# Altium PCB front_controller.PcbDoc
Units mil, origin at the board's own origin, x right, y up, seen from the top; angles counter-clockwise.
Board outline 2850 x 1885 mil, 2 copper layers (Top Layer, Bottom Layer); 15 components, 18 nets, 84 pads, 0 vias.
Unrouted connection lines stored in the file: 32.
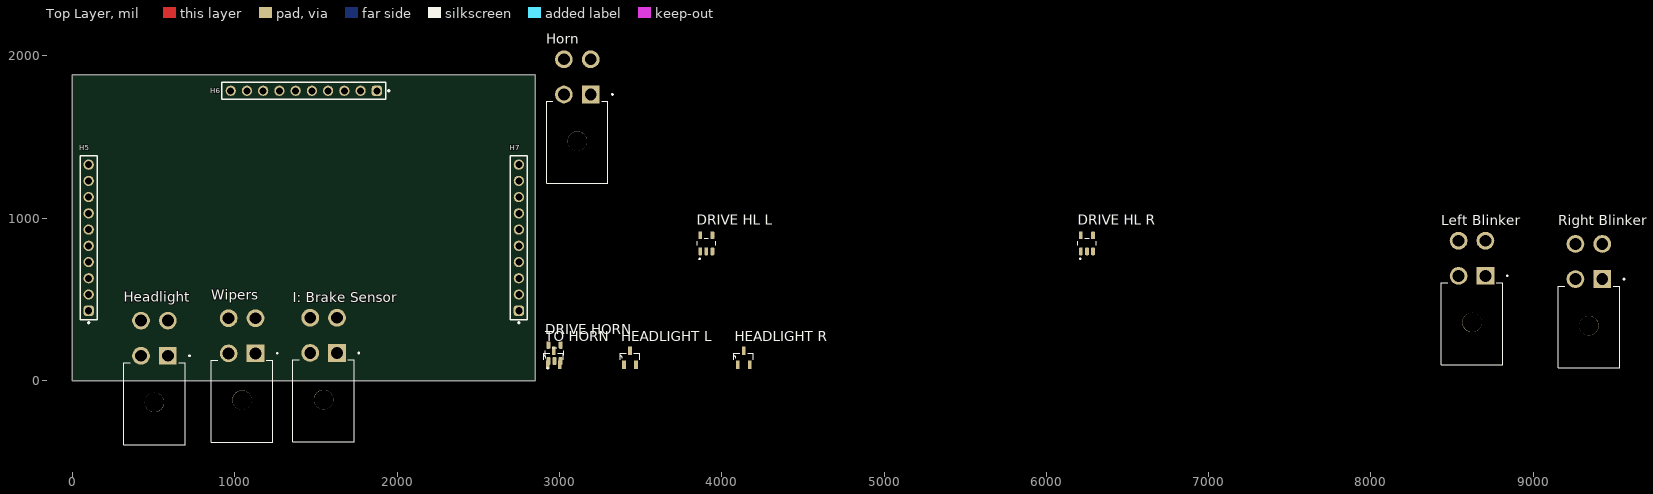
[diagram p0: Top Layer view]
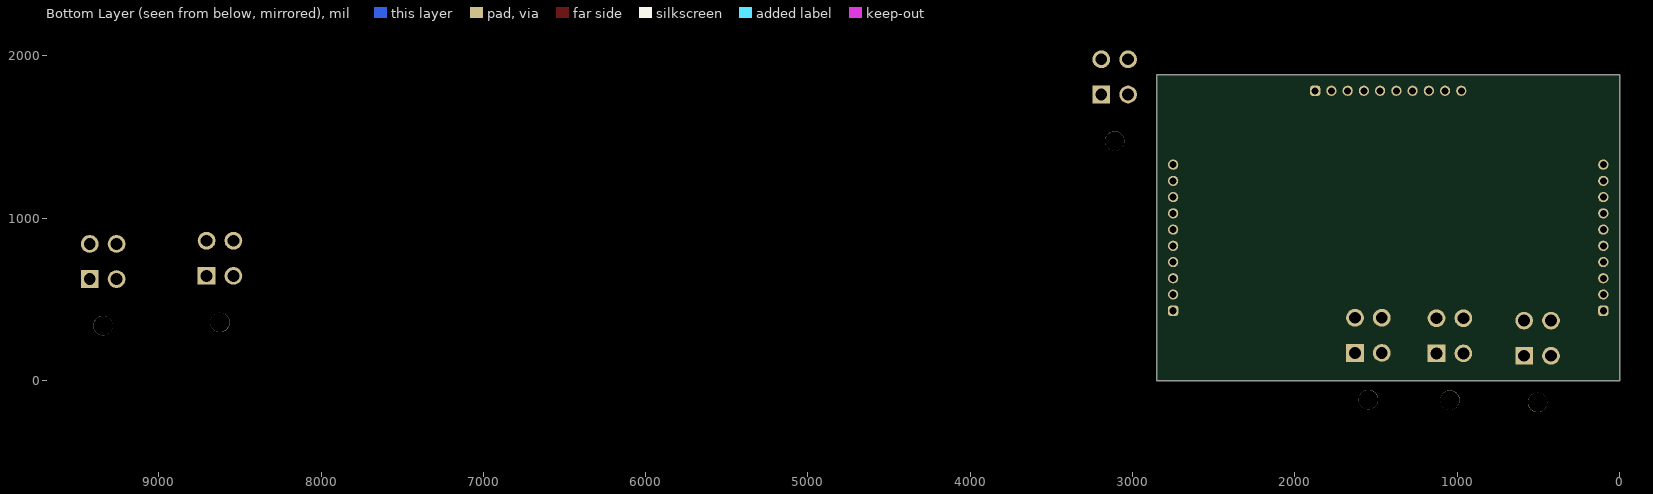
[diagram p1: Bottom Layer view, seen from below]

## Layer stack, top to bottom
Top Solder: solder mask 0.4, Solder Resist, Dk 3.5
Top Layer: signal copper 1.4
Dielectric 1: dielectric 12.6, FR-4, Dk 4.8
Bottom Layer: signal copper 1.4
Bottom Solder: solder mask 0.4, Solder Resist, Dk 3.5

## Board outline
0,0 2850,0 2850,1885 0,1885

## Design rules (kind name [scope] priority, off if disabled: settings)
Clearance [All] p1: gap=10 ignorepadtopadclearanceinfootprint=FALSE
PolygonConnect [All] p1: connectstyle=Relief reliefconductorwidth=10 reliefentries=4 polygonreliefangle="90 Angle" airgapwidth=10
RoutingVias [All] p1: holewidth=28 width=50 viastyle="Through Hole" minholewidth=28 minwidth=50 maxholewidth=28 maxwidth=50
SolderMaskExpansion [All] p1: expansion=4 istentingtop=FALSE
Width [All] p1: maxlimit=10 minlimit=10 preferedwidth=10
30 further rules are at their usual default settings.

## Components (designator, comment, footprint, x,y, rotation, side; value= is the part's Value field where it differs from the comment)
"DRIVE HL L" "UCC27519DBVR" SOT95P280X145-5N 3905,845 r90 top
"DRIVE HL R" "UCC27519DBVR" SOT95P280X145-5N 6250,845 r90 top
"DRIVE HORN" "UCC27519DBVR" SOT95P280X145-5N 2970,170 r90 top
H5 "61301011121" 61301011121 100,880 r90 top
H6 "61301011121" 61301011121 1425,1785 r180 top
H7 "61301011121" 61301011121 2750,880 r90 top
Headlight "0026013115" MOLEX_0026013115 587.68,152.4 r0 top
"HEADLIGHT L" "IRLML6344TRPBF" SOT95P240X112-3N 3435,140 r90 top
"HEADLIGHT R" "IRLML6344TRPBF" SOT95P240X112-3N 4135,140 r90 top
Horn "0026013115" MOLEX_0026013115 3192.68,1762.4 r0 top
"I: Brake Sensor" "0026013115" MOLEX_0026013115 1630,170 r0 top
"Left Blinker" "0026013115" MOLEX_0026013115 8705,645 r0 top
"Right Blinker" "0026013115" MOLEX_0026013115 9425,625 r0 top
"TO HORN" "IRLML6344TRPBF" SOT95P240X112-3N 2965,140 r90 top
Wipers "0026013115" MOLEX_0026013115 1127.68,167.4 r0 top

## Footprints (in the part's own frame and the unit in brackets; to place one, negate y for a bottom-side part, rotate by r counter-clockwise, add the part's x,y. Pads: shape width x height; smd on the part's side, far side on the other; paste and mask are expansions set on the pad)
61301011121 [mm] "Pin Header, pitch 2.54 mm, THT, Vertical, single row, 10p"
  rrect50% 1.6x1.6 hole 1.1: 1(-11.43,0)
  round 1.6 hole 1.1: 2(-8.89,0) 3(-6.35,0) 4(-3.81,0) 5(-1.27,0) 6(1.27,0) 7(3.81,0) 8(6.35,0) 9(8.89,0) 10(11.43,0)
  silkscreen extent -13.42,-1.35 12.85,1.35, body extent -12.7,-1.27 12.7,1.27, height 8.57
MOLEX_0026013115 [mm]
  rect 2.775x2.775 hole 1.85: 1(0,0)
  round 2.775 hole 1.85: 2(-4.2,0) 3(0,5.5) 4(-4.2,5.5)
  round 3.05 hole 3.05 unplated: ""(-2.1,-7.3)
  silkscreen extent -6.9,-13.9 3.5,0.1
SOT95P240X112-3N [mil]
  rect 52x22 smd: 1(-43,37) 2(-43,-37) 3(43,0)
  silkscreen extent -11,-60 28,60
SOT95P280X145-5N [mm]
  rrect50% 1.21x0.59 smd: 1(-1.255,0.95) 2(-1.255,0) 3(-1.255,-0.95) 4(1.255,-0.95) 5(1.255,0.95)
  silkscreen extent -2.51,-1.45 0.8,1.45

## Part data
"DRIVE HL L" "DRIVE HL R" "DRIVE HORN": Package=None, Availability=Unavailable, MP=UCC27519DBVR, Price=None
H5 H6 H7: "WR-PHD Pin Header, THT, Vertical, pitch 2.54mm, 1 Row, 10P", Contact Resistance=20mOhm, Manufacturer="Wurth Elektronik", Operating Temperature Max=105°C, Operating Temperature Min=-40°C, Rated Current=3A, Withstanding Voltage=500V, Working Voltage=250V, Category="Board-to-Board Connectors", ComponentLink1Description="Website Link", ComponentLink1URL=https://www.we-online.com/redexpert/article/61301011121?ad, ComponentLink2Description="Datasheet Link", ComponentLink2URL=https://www.we-online.com/redexpert/spec/61301011121?ad, Gender="Pin Header", Manufacturer Part Number=61301011121, Match Code=WR-PHD, Mount="Through Hole", Number of Pins=10, Number of Rows=1, Orientation=Vertical, Packaging=Bag, Pitch=2.54mm
Headlight Horn "I: Brake Sensor" "Left Blinker" "Right Blinker" Wipers: "Connector Header Through Hole, Right Angle 4 position 0.165 (4.20mm)", Package=None, Availability=Unavailable, DigiKey-Purchase-URL=https://snapeda.com/shop?store=DigiKey&id=2597941, MF=Molex, MP=0026013115, Price=None, SnapEDA_Link=https://www.snapeda.com/parts/0026013115/Molex/view-part/2597941/?ref=snap
"HEADLIGHT L" "HEADLIGHT R" "TO HORN": "N-Channel 30V 5A _Ta_ 1.3W _Ta_ Surface Mount Micro3â„¢/SOT-23", Package="SOT-23 Infineon", Availability=Unavailable, MF="Infineon Technologies", MP=IRLML6344TRPBF, Price=None, SnapEDA_Link=https://www.snapeda.com/parts/IRLML6344TRPBF/Infineon%20Technologies/view-part/1786730/?ref=snap

## Nets (pads, with @x,y where several pads share a name; then routed paths per layer and width w, separated by ;. In a path a pad name is that pad's centre, name@x,y a point inside that pad or via, vN(x,y) a via of type N, cw(c..) or ccw(c..) an arc to the next point about the centre after c; other vN are vias at no path point)
+5: "DRIVE HL L.5" "DRIVE HL R.5" "DRIVE HORN.5" "I: Brake Sensor.1" "Left Blinker.1" "Right Blinker.1" H7.4
+7: H7.3 Wipers.1
+12: H7.2 Headlight.1 Headlight.4
D0: "DRIVE HORN.3" H7.10
D3: "Left Blinker.3" H6.1
D4: "Right Blinker.3" H6.2
D5: "I: Brake Sensor.3" H6.3
D6: H6.4 Wipers.3
D7: "DRIVE HL L.3" H6.5
D8: "DRIVE HL R.3" H6.6
Drain1: "HEADLIGHT L.3" Headlight.2
Drain2: "HEADLIGHT R.3" Headlight.3
Drain3: "TO HORN.3" Horn.1
GND: "DRIVE HL L.2" "DRIVE HL R.2" "DRIVE HORN.2" "HEADLIGHT L.2" "HEADLIGHT R.2" "I: Brake Sensor.2" "Left Blinker.2" "Right Blinker.2" H7.1 Wipers.2
"NetDRIVE HL L_4": "DRIVE HL L.4" "HEADLIGHT L.1"
"NetDRIVE HL R_4": "DRIVE HL R.4" "HEADLIGHT R.1"
"NetDRIVE HORN_4": "DRIVE HORN.4" "TO HORN.1"
Source3: "TO HORN.2" Horn.2
pads on no net: "DRIVE HL L.1" "DRIVE HL R.1" "DRIVE HORN.1" "I: Brake Sensor.4" "I: Brake Sensor." "Left Blinker.4" "Left Blinker." "Right Blinker.4" "Right Blinker." H5.1 H5.2 H5.3 H5.4 H5.5 H5.6 H5.7 H5.8 H5.9 H5.10 H6.7 H6.8 H6.9 H6.10 H7.5 H7.6 H7.7 H7.8 H7.9 Headlight. Horn. Horn.3 Horn.4 Wipers. Wipers.4

## Silkscreen, mask and mechanical layers (free items; w line width, h text height)
Mechanical 1:
  the board outline again, w10